# Altium PCB PCB3.PcbDoc (part 2 of 2)
Units mm, origin at the board's own origin, x right, y up, seen from the top; angles counter-clockwise.
Board outline 100 x 100 mm, 4 copper layers (Top Layer, Inner Top Layer, Inner Bottom Layer, Bottom Layer), stack 1.64 mm thick; 201 components, 196 nets, 716 pads, 122 vias.
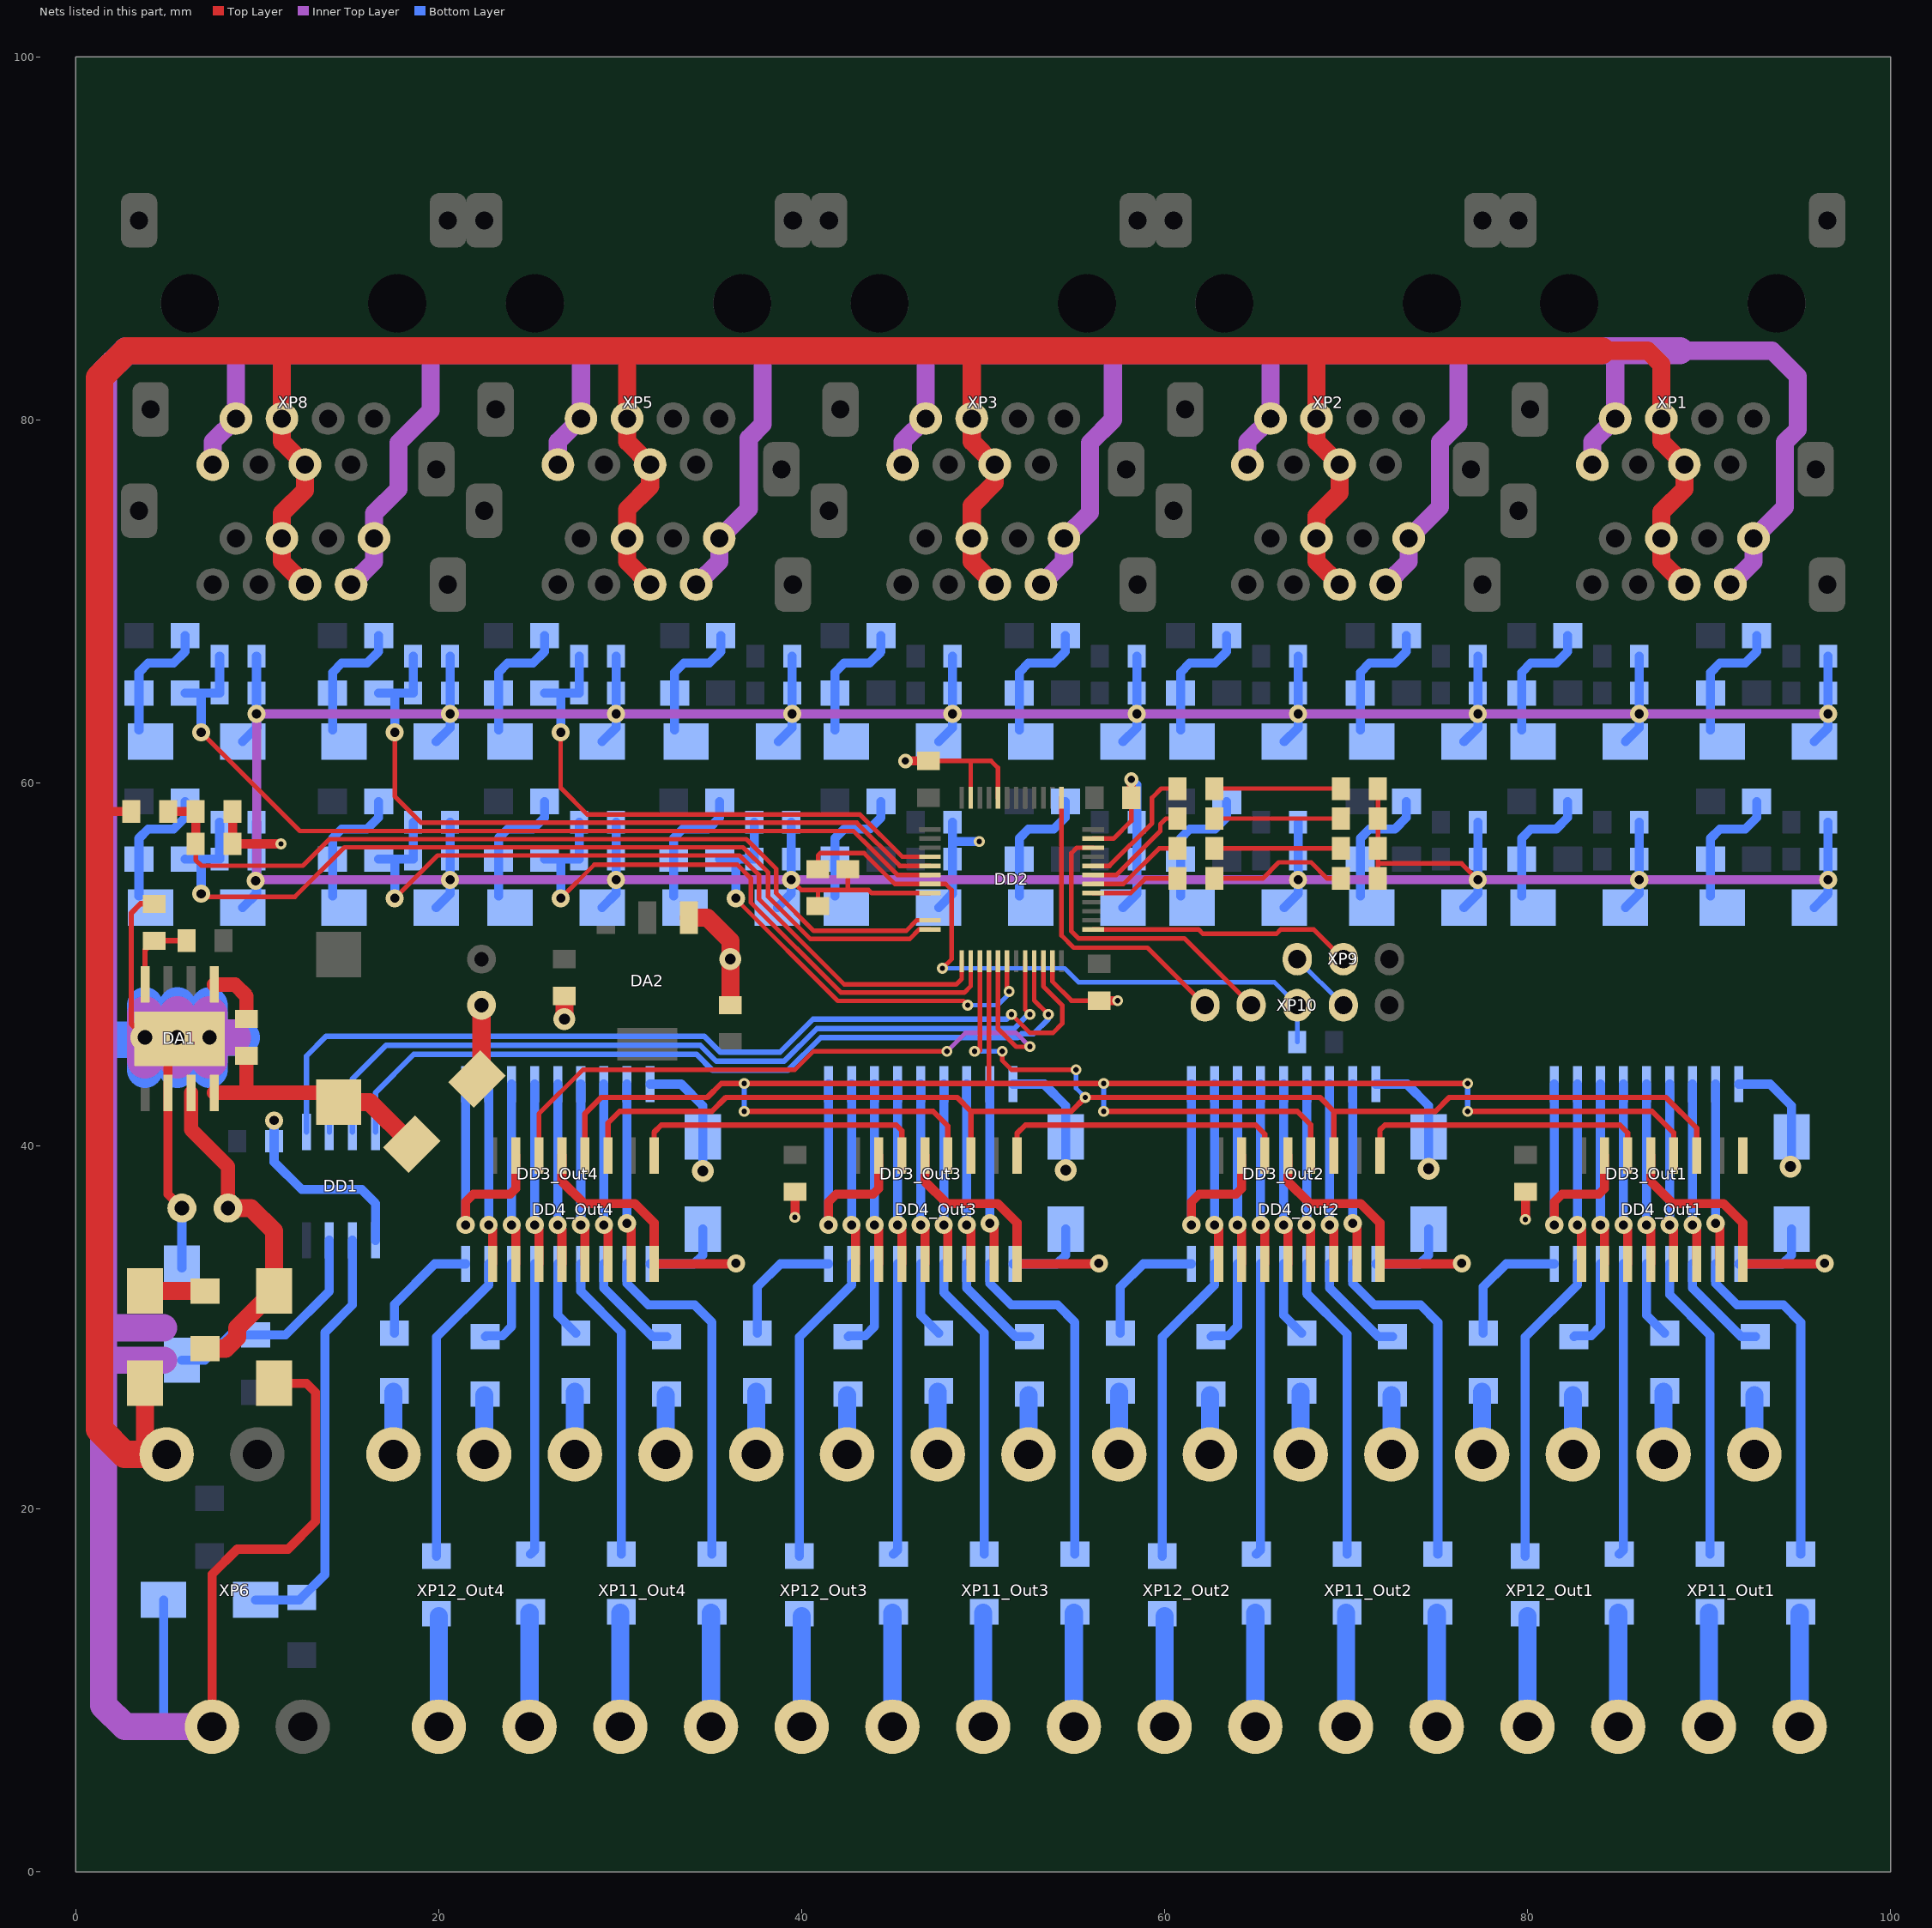
[diagram p4: the nets of this part, all layers, seen from the top]

## Via types
v1: diameter 1, hole 0.5, Top Layer to Bottom Layer, tented both sides, 81 vias
v2: diameter 0.6, hole 0.3, Top Layer to Bottom Layer, tented both sides, 24 vias
v3: diameter 1.2, hole 0.6, Top Layer to Bottom Layer, tented both sides, 7 vias
v4: diameter 0.8, hole 0.4, Top Layer to Bottom Layer, tented both sides, 5 vias
v5: diameter 1.6, hole 0.8, Top Layer to Bottom Layer, tented both sides, 3 vias
v6: diameter 0.6, hole 0.3, Top Layer to Bottom Layer, 2 vias

## Nets (pads, with @x,y where several pads share a name; then routed paths per layer and width w, separated by ;. In a path a pad name is that pad's centre, name@x,y a point inside that pad or via, vN(x,y) a via of type N, cw(c..) or ccw(c..) an arc to the next point about the centre after c; other vN are vias at no path point) (continued)
DI_MCU_14: C12_DI14.1 DD2.4 R7_DI14.2 R8_DI14.1 | length 31.1
  Top Layer w0.25: v1(26.718,62.791) 26.718,59.733 28.194,58.257 43.22,58.257 45.545,55.932 DD2.4@47.066,55.932
  Bottom Layer w0.5: R8_DI14.1@25.829,64.95 26.718,64.95 ; v1(26.718,62.791) 26.718,64.95 ; R7_DI14.2@27.734,66.982 C12_DI14.1@27.734,64.95 26.718,64.95
DI_MCU_15: C12_DI15.1 DD2.14 R7_DI15.2 R8_DI15.1 | length 34.7
  Top Layer w0.25: v1(26.718,53.647) 28.57,55.499 36.449,55.499 37.195,54.753 37.195,53.418 42.168,48.445 48.953,48.445 49.316,48.808 DD2.14@49.316,50.182
  Bottom Layer w0.5: R8_DI15.1@25.829,55.806 26.718,55.806 ; v1(26.718,53.647) 26.718,55.806 ; R7_DI15.2@27.734,57.838 C12_DI15.1@27.734,55.806 26.718,55.806
DI_MCU_16: C12_DI16.1 DD2.18 R7_DI16.2 R8_DI16.1 | length 25.7
  Top Layer w0.25: v1(36.37,53.647) 36.37,53.607 41.982,47.995 48.906,47.995 v2(49.149,47.752) ; DD2.18@51.316,50.182 51.316,48.633 v2(51.435,48.514)
  Bottom Layer w0.25: v2(49.149,47.752) 50.8,47.752 51.435,48.387 v2(51.435,48.514)
  Bottom Layer w0.5: R8_DI16.1@35.481,55.806 36.37,55.806 ; v1(36.37,53.647) 36.37,55.806 ; R7_DI16.2@37.386,57.838 C12_DI16.1@37.386,55.806 36.37,55.806
DI_MCU_17: C12_DI17.1 DD2.5 R7_DI17.2 R8_DI17.1 | length 40.7
  Top Layer w0.25: v1(17.574,62.791) 17.574,59.261 19.028,57.807 43.034,57.807 45.409,55.432 DD2.5@47.066,55.432
  Bottom Layer w0.5: R8_DI17.1@16.685,64.95 17.574,64.95 ; v1(17.574,62.791) 17.574,64.95 ; R7_DI17.2@18.59,66.982 C12_DI17.1@18.59,64.95 17.574,64.95
DI_MCU_18: C12_DI18.1 DD2.6 R7_DI18.2 R8_DI18.1 | length 49.5
  Top Layer w0.25: v1(6.906,62.791) 12.34,57.357 42.847,57.357 43.874,56.33 45.272,54.932 DD2.6@47.066,54.932
  Bottom Layer w0.5: R8_DI18.1@6.017,64.95 6.906,64.95 ; v1(6.906,62.791) 6.906,64.95 ; R7_DI18.2@7.922,66.982 C12_DI18.1@7.922,64.95 6.906,64.95
DI_MCU_19: C12_DI19.1 DD2.12 R7_DI19.2 R8_DI19.1 | length 50.3
  Top Layer w0.25: v1(6.906,53.896) 7.081,53.721 12.065,53.721 14.801,56.457 36.764,56.457 38.143,55.078 38.143,53.743 40.483,51.403 45.943,51.403 46.472,51.932 DD2.12@47.066,51.932
  Bottom Layer w0.5: R8_DI19.1@6.017,55.806 6.906,55.806 ; v1(6.906,53.896) 6.906,55.806 ; R7_DI19.2@7.922,57.838 C12_DI19.1@7.922,55.806 6.906,55.806
DI_MCU_20: C12_DI20.1 DD2.13 R7_DI20.2 R8_DI20.1 | length 43.2
  Top Layer w0.25: v1(17.574,53.647) 19.934,56.007 36.577,56.007 37.645,54.939 37.645,53.605 42.355,48.895 48.514,48.895 48.816,49.197 DD2.13@48.816,50.182
  Bottom Layer w0.5: R8_DI20.1@16.685,55.806 17.574,55.806 ; v1(17.574,53.647) 17.574,55.806 ; R7_DI20.2@18.59,57.838 C12_DI20.1@18.59,55.806 17.574,55.806
FB: DA1.4 R1.2 R2.1 | length 4.4
  Top Layer w0.3: DA1.4@3.81,48.895 3.81,50.8 R2.1@4.318,51.308 R1.2@6.096,51.308
GND: C1.1 C3.1 C4.1 C5.1 C6.1 C7.1 C8.1 C9.1 C10.1 C11.1 C12_DI1.2 C12_DI2.2 C12_DI3.2 C12_DI4.2 C12_DI5.2 C12_DI6.2 C12_DI7.2 C12_DI8.2 C12_DI9.2 C12_DI10.2 C12_DI11.2 C12_DI12.2 C12_DI13.2 C12_DI14.2 C12_DI15.2 C12_DI16.2 C12_DI17.2 C12_DI18.2 C12_DI19.2 C12_DI20.2 C13.1 C14.1 C15.1 DA1.6 DA1.9@5.715,45.898 DA2.1 DD1.5 DD2.8 DD2.23 DD2.35 DD2.44 DD2.47 DD3_Out1.9 DD3_Out2.9 DD3_Out3.9 DD3_Out4.9 DD4_Out1.8 DD4_Out1.13 DD4_Out2.8 DD4_Out2.13 DD4_Out3.8 DD4_Out3.13 DD4_Out4.8 DD4_Out4.13 R2.2 R4.2 R7_DI1.1 R7_DI2.1 R7_DI3.1 R7_DI4.1 R7_DI5.1 R7_DI6.1 R7_DI7.1 R7_DI8.1 R7_DI9.1 R7_DI10.1 R7_DI11.1 R7_DI12.1 R7_DI13.1 R7_DI14.1 R7_DI15.1 R7_DI16.1 R7_DI17.1 R7_DI18.1 R7_DI19.1 R7_DI20.1 R9.2 R10.2 R11.2 R12.2 VD2.1 VD3.1 VD4.1 VD5.1 VD6_DI1.1 VD6_DI2.1 VD6_DI3.1 VD6_DI4.1 VD6_DI5.1 VD6_DI6.1 VD6_DI7.1 VD6_DI8.1 VD6_DI9.1 VD6_DI10.1 VD6_DI11.1 VD6_DI12.1 VD6_DI13.1 VD6_DI14.1 VD6_DI15.1 VD6_DI16.1 VD6_DI17.1 VD6_DI18.1 VD6_DI19.1 VD6_DI20.1 VD7_Out1.1 VD7_Out2.1 VD7_Out3.1 VD7_Out4.1 XP1.7 XP1.8 XP1.17 XP1.18 XP2.7 XP2.8 XP2.17 XP2.18 XP3.7 XP3.8 XP3.17 XP3.18 XP5.7 XP5.8 XP5.17 XP5.18 XP6.2 XP8.7 XP8.8 XP8.17 XP8.18 XP9.3 XP10.2 | length 809.9
  Top Layer w0.25: v1(39.418,54.663) 39.979,54.102 40.894,54.102 ; C11.1@40.894,53.213 40.894,54.102 ; 42.545,54.102 C8.1@42.545,55.245 ; C9.1@46.99,61.214 49.316,61.214 ; DD2.8@47.066,53.932 43.858,53.932 43.688,54.102 40.894,54.102 ; DD2.47@49.316,59.182 49.316,61.214 ; DD2.44@50.816,59.182 50.816,60.833 50.435,61.214 49.316,61.214 ; DD2.23@53.816,50.182 53.816,49.054 54.864,48.006 C7.1@56.388,48.006 ; DD2.35@56.066,56.932 57.186,56.932 58.166,57.912 C10.1@58.166,59.182 ; R9.2@71.755,54.737 71.755,55.562 ; R12.2@71.755,59.69 R11.2@71.755,58.039 R10.2@71.755,56.388 71.755,55.562 ; v1(77.264,54.663) 76.365,55.562 71.755,55.562
  Top Layer w0.3: R2.2@4.318,53.34 3.556,53.34 3.048,52.832 3.048,46.736 v5(3.81,45.974) 3.886,45.898 DA1.9@5.715,45.898
  Top Layer w0.5: DA1.9@5.08,45.263 DA1.6@5.08,42.926 5.08,37.338 C1.1@5.842,36.576 ; XP6.2@7.5,8 7.5,16.39 8.89,17.78 11.684,17.78 13.208,19.304 13.208,26.416 12.7,26.924 VD2.1@10.922,26.924 ; R4.2@8.636,58.42 C3.1@8.636,56.642 v2(11.303,56.642) ; DD4_Out4.13@26.787,39.469 26.787,38.04 27.997,36.83 30.791,36.83 31.867,35.754 DD4_Out4.8@31.867,33.5 36.351,33.5 v1(36.379,33.528) ; v2(39.624,36.068) C14.1@39.624,37.465 ; v4(45.72,61.214) C9.1@46.99,61.214 ; DD4_Out3.13@46.787,39.469 46.787,38.04 47.997,36.83 50.791,36.83 51.867,35.754 DD4_Out3.8@51.867,33.5 56.351,33.5 v1(56.379,33.528) ; C7.1@56.388,48.006 v2(57.404,48.006) ; C10.1@58.166,59.182 v4(58.166,60.198) ; DD4_Out2.13@66.787,39.469 66.787,38.04 67.997,36.83 70.791,36.83 71.867,35.754 DD4_Out2.8@71.867,33.5 76.351,33.5 v1(76.379,33.528) ; v2(79.883,35.941) C13.1@79.883,37.465 ; DD4_Out1.13@86.787,39.469 86.787,38.04 87.997,36.83 90.791,36.83 91.867,35.754 DD4_Out1.8@91.867,33.5 96.351,33.5 v1(96.379,33.528)
  Top Layer w1: VD3.1@22.098,43.688 22.352,43.942 C4.1@22.352,47.752 ; v3(26.924,46.99) C5.1@26.924,48.26 ; DA2.1@33.782,52.578 34.798,52.578 36.068,51.308 v3(36.068,50.292) C6.1@36.068,47.752
  Inner Top Layer w0.5: v1(9.954,63.807) v1(20.622,63.807) v1(29.766,63.807) v1(39.474,63.807) v1(48.308,63.807) v1(58.468,63.807) v1(67.358,63.807) v1(77.264,63.807) v1(86.154,63.807) v1(96.568,63.807) ; v1@9.959,63.802 9.959,54.663 v1(20.622,54.663) v1(29.766,54.663) v1(39.418,54.663) v1(67.358,54.663) v1(77.264,54.663) v1(86.154,54.663) v1(96.568,54.663)
  Inner Top Layer w1: XP8.8@7.546,77.538 7.546,78.808 XP8.7@8.816,80.078 8.816,83.746 ; XP8.17@15.166,70.934 16.436,72.204 XP8.18@16.436,73.474 16.436,74.856 17.78,76.2 17.78,78.74 19.558,80.518 19.558,83.82 ; XP5.8@26.564,77.538 26.564,78.808 XP5.7@27.834,80.078 27.834,83.672 ; XP5.17@34.184,70.934 35.454,72.204 XP5.18@35.454,73.474 37.084,75.104 37.084,78.994 37.846,79.756 37.846,83.82 ; XP3.8@45.564,77.538 45.564,78.808 XP3.7@46.834,80.078 46.834,83.41 ; XP3.17@53.184,70.934 54.454,72.204 XP3.18@54.454,73.474 55.88,74.9 55.88,78.74 57.15,80.01 57.15,83.82 ; XP2.8@64.564,77.538 64.564,78.808 XP2.7@65.834,80.078 65.834,83.36 ; XP2.17@72.184,70.934 73.454,72.204 XP2.18@73.454,73.474 75.183,75.203 75.183,78.781 76.2,79.798 76.2,83.82 ; XP1.8@83.564,77.538 83.564,78.808 XP1.7@84.834,80.078 84.834,83.818 ; 88.392,83.82 93.472,83.82 94.886,82.406 94.886,79.484 94.183,78.781 94.183,75.203 XP1.18@92.454,73.474 92.454,72.204 XP1.17@91.184,70.934
  Inner Top Layer w1.5: 4.826,28.194 1.532,28.194 ; 4.826,29.972 1.532,29.972 ; XP6.2@7.5,8 2.702,8 1.532,9.17 1.532,28.194 ; 88.392,83.82 76.2,83.82 57.15,83.82 37.846,83.82 19.558,83.82 2.794,83.82 1.532,82.558 1.532,29.972 ; 1.532,28.194 1.532,29.972
  Inner Top Layer w2: 3.81,44.704 v5(3.81,45.974) 3.81,47.244 ; 5.588,44.704 v5(5.588,45.974) 5.588,47.244 ; 7.366,44.704 v5(7.366,45.974) ; 7.366,47.244 v5(7.366,45.974) ; 8.636,45.974 v5(7.366,45.974)
  Bottom Layer w0.25: XP9.3@67.31,50.292 XP10.2@69.85,47.752
  Bottom Layer w0.5: VD5.1@4.826,14.986 4.826,8.382 5.208,8 XP6.2@7.5,8 ; VD4.1@5.842,33.274 C1.1@5.842,36.576 ; VD6_DI19.1@9.192,53.139 9.954,53.901 v1@9.954,54.61 ; VD6_DI18.1@9.192,62.283 9.954,63.045 v1(9.954,63.807) C12_DI18.2@9.954,64.95 R7_DI18.1@9.954,66.982 ; v1(9.906,54.61) v1@9.954,54.61 ; R7_DI19.1@9.954,57.838 C12_DI19.2@9.954,55.806 v1@9.954,54.61 ; v1(10.922,41.402) C15.1@10.922,40.259 10.922,39.116 12.446,37.592 15.748,37.592 16.51,36.83 DD1.5@16.51,34.798 ; VD6_DI20.1@19.86,53.139 20.622,53.901 v1(20.622,54.663) C12_DI20.2@20.622,55.806 R7_DI20.1@20.622,57.838 ; VD6_DI17.1@19.86,62.283 20.622,63.045 v1(20.622,63.807) C12_DI17.2@20.622,64.95 R7_DI17.1@20.622,66.982 ; VD6_DI15.1@29.004,53.139 29.766,53.901 v1(29.766,54.663) C12_DI15.2@29.766,55.806 R7_DI15.1@29.766,57.838 ; VD6_DI14.1@29.004,62.283 29.766,63.045 v1(29.766,63.807) C12_DI14.2@29.766,64.95 R7_DI14.1@29.766,66.982 ; DD3_Out4.9@31.637,43.406 33.359,43.406 34.557,42.208 VD7_Out4.1@34.557,40.5 v3(34.557,38.621) ; VD6_DI16.1@38.656,53.139 39.418,53.901 v1(39.418,54.663) C12_DI16.2@39.418,55.806 R7_DI16.1@39.418,57.838 ; VD6_DI13.1@38.712,62.283 39.474,63.045 v1(39.474,63.807) C12_DI13.2@39.474,64.95 R7_DI13.1@39.474,66.982 ; VD6_DI11.1@47.546,53.139 48.308,53.901 C12_DI11.2@48.308,55.806 48.308,56.769 ; VD6_DI10.1@47.546,62.283 48.308,63.045 v1(48.308,63.807) C12_DI10.2@48.308,64.95 R7_DI10.1@48.308,66.982 ; R7_DI11.1@48.308,57.838 48.308,56.769 ; v2(49.784,56.769) 48.308,56.769 ; DD3_Out3.9@51.637,43.406 53.359,43.406 54.557,42.208 VD7_Out3.1@54.557,40.5 v3(54.557,38.661) ; VD6_DI12.1@57.706,53.139 58.468,53.901 C12_DI12.2@58.468,55.806 R7_DI12.1@58.468,57.838 58.468,59.896 v4(58.166,60.198) ; VD6_DI9.1@57.706,62.283 58.468,63.045 v1(58.468,63.807) C12_DI9.2@58.468,64.95 R7_DI9.1@58.468,66.982 ; VD6_DI7.1@66.596,53.139 67.358,53.901 v1(67.358,54.663) C12_DI7.2@67.358,55.806 R7_DI7.1@67.358,57.838 ; VD6_DI6.1@66.596,62.283 67.358,63.045 v1(67.358,63.807) C12_DI6.2@67.358,64.95 R7_DI6.1@67.358,66.982 ; DD3_Out2.9@71.637,43.406 73.359,43.406 74.557,42.208 VD7_Out2.1@74.557,40.5 v3(74.557,38.743) ; VD6_DI8.1@76.502,53.139 77.264,53.901 v1(77.264,54.663) C12_DI8.2@77.264,55.806 R7_DI8.1@77.264,57.838 ; VD6_DI5.1@76.502,62.283 77.264,63.045 v1(77.264,63.807) C12_DI5.2@77.264,64.95 R7_DI5.1@77.264,66.982 ; VD6_DI3.1@85.392,53.139 86.154,53.901 v1(86.154,54.663) C12_DI3.2@86.154,55.806 R7_DI3.1@86.154,57.838 ; VD6_DI2.1@85.392,62.283 86.154,63.045 v1(86.154,63.807) C12_DI2.2@86.154,64.95 R7_DI2.1@86.154,66.982 ; DD3_Out1.9@91.637,43.406 93.359,43.406 94.557,42.208 VD7_Out1.1@94.557,40.5 94.557,38.931 v3(94.488,38.862) ; VD6_DI4.1@95.806,53.139 96.568,53.901 v1(96.568,54.663) C12_DI4.2@96.568,55.806 R7_DI4.1@96.568,57.838 ; VD6_DI1.1@95.806,62.283 96.568,63.045 v1(96.568,63.807) C12_DI1.2@96.568,64.95 R7_DI1.1@96.568,66.982
  Bottom Layer w2: 1.905,45.847 v5@3.683,45.847 ; 3.81,44.196 v5(3.81,45.974) 3.81,47.752 ; 5.588,44.196 v5(5.588,45.974) 5.588,47.752 ; 7.366,44.196 v5(7.366,45.974) ; 7.366,47.752 v5(7.366,45.974) ; 9.144,45.974 v5(7.366,45.974)
LC: DD2.16 DD4_Out1.12 DD4_Out2.12 DD4_Out3.12 DD4_Out4.12 | length 102.6
  Top Layer w0.25: 50.316,43.458 DD2.16@50.316,50.182
  Top Layer w0.3: DD4_Out4.12@28.057,39.469 28.057,41.773 28.956,42.672 34.798,42.672 35.56,43.434 v2(36.83,43.434) v2(56.642,43.434) v2(76.708,43.434) ; v2(36.83,41.91) 47.244,41.91 48.057,41.097 DD4_Out3.12@48.057,39.469 ; v2(56.642,41.91) 67.31,41.91 68.057,41.163 DD4_Out2.12@68.057,39.469 ; v2(76.708,41.91) 86.868,41.91 88.057,40.721 DD4_Out1.12@88.057,39.469
  Bottom Layer w0.3: v2(36.83,41.91) v2(36.83,43.434) ; v2(56.642,41.91) v2(56.642,43.434) ; v2(76.708,41.91) v2(76.708,43.434)
"LED 1": DD2.29 HL1.1 | length 5
  Top Layer w0.25: DD2.29@56.066,53.932 58.123,53.932 58.928,54.737 HL1.1@60.706,54.737
"LED 2": DD2.30 HL2.1 | length 5.5
  Top Layer w0.25: DD2.30@56.066,54.432 57.734,54.432 59.69,56.388 HL2.1@60.706,56.388
"LED 3": DD2.31 HL3.1 | length 6.2
  Top Layer w0.25: DD2.31@56.066,54.932 57.345,54.932 59.759,57.346 59.759,57.727 60.071,58.039 HL3.1@60.706,58.039
"LED 4": DD2.32 HL4.1 | length 7.2
  Top Layer w0.25: DD2.32@56.066,55.432 56.956,55.432 59.309,57.785 59.309,59.182 59.817,59.69 HL4.1@60.706,59.69
MOSI: DD2.17 DD4_Out4.14 | length 37.4
  Top Layer w0.25: DD4_Out4.14@25.517,39.469 25.517,41.773 27.94,44.196 39.624,44.196 40.64,45.212 v6(48.006,45.212) ; DD2.17@50.816,50.182 50.81,50.176 50.81,46.472 51.816,45.466 v6(52.578,45.466)
  Inner Top Layer w0.25: v6(48.006,45.212) 49.022,46.228 51.816,46.228 v6(52.578,45.466)
NetC1_2: C1.2 DA1.7 FU1.2 VD2.2 | length 19
  Top Layer w0.8: DA1.7@6.35,42.926 6.35,40.894 8.382,38.862 C1.2@8.382,36.576
  Top Layer w1: FU1.2@7.112,28.829 8.255,28.829 8.89,29.464 8.89,29.972 VD2.2@10.922,32.004 10.922,35.306 9.652,36.576 C1.2@8.382,36.576
NetC2_1: C2.1 DA1.1 | length 3.3
  Top Layer w0.8: DA1.1@7.62,48.895 8.763,48.895 9.398,48.26 C2.1@9.398,46.99
NetC2_2: C2.2 DA1.8 L1.2 VD3.2 | length 14.1
  Top Layer w0.8: DA1.8@7.62,42.926 9.398,42.926 ; C2.2@9.398,44.958 9.398,42.926 ; L1.2@14.478,42.418 13.97,42.926 9.398,42.926
  Top Layer w1: L1.2@14.478,42.418 16.184,42.418 VD3.2@18.506,40.096
NetDD1_6: DD1.6 FU3.2 VD5.2 | length 23.3
  Bottom Layer w0.5: VD5.2@9.906,14.986 FU3.2@12.319,14.986 ; FU3.2@12.446,15.113 13.716,16.383 13.716,29.718 15.24,31.242 DD1.6@15.24,34.798
NetDD1_7: DD1.7 FU2.2 VD4.2 | length 12.5
  Bottom Layer w0.5: VD4.2@5.842,28.194 7.112,28.194 8.509,29.591 FU2.2@9.906,29.591 11.557,29.591 13.97,32.004 DD1.7@13.97,34.798
NetDD3_Out1_1: DD3_Out1.1 DD4_Out1.15 | length 13.9
  Top Layer w0.5: v1(81.477,35.644) 81.477,36.914 81.901,37.338 83.933,37.338 84.247,37.652 DD4_Out1.15@84.247,39.469
  Bottom Layer w0.5: v1(81.477,35.644) DD3_Out1.1@81.477,43.406
NetDD3_Out1_2: DD3_Out1.2 DD4_Out1.1 | length 10
  Top Layer w0.5: v1(82.747,35.644) 82.977,35.414 DD4_Out1.1@82.977,33.5
  Bottom Layer w0.5: v1(82.747,35.644) DD3_Out1.2@82.747,43.406
NetDD3_Out1_3: DD3_Out1.3 DD4_Out1.2 | length 9.7
  Top Layer w0.5: DD4_Out1.2@84.247,33.5 v1@84.247,35.414
  Bottom Layer w0.5: v1(84.017,35.644) DD3_Out1.3@84.017,43.406
NetDD3_Out1_4: DD3_Out1.4 DD4_Out1.3 | length 9.7
  Top Layer w0.5: DD4_Out1.3@85.517,33.5 v1@85.517,35.414
  Bottom Layer w0.5: v1(85.287,35.644) DD3_Out1.4@85.287,43.406
NetDD3_Out1_5: DD3_Out1.5 DD4_Out1.4 | length 9.7
  Top Layer w0.5: DD4_Out1.4@86.787,33.5 v1@86.787,35.414
  Bottom Layer w0.5: v1(86.557,35.644) DD3_Out1.5@86.557,43.406
NetDD3_Out1_6: DD3_Out1.6 DD4_Out1.5 | length 9.7
  Top Layer w0.5: DD4_Out1.5@88.057,33.5 v1@88.057,35.414
  Bottom Layer w0.5: v1(87.827,35.644) DD3_Out1.6@87.827,43.406
NetDD3_Out1_7: DD3_Out1.7 DD4_Out1.6 | length 9.7
  Top Layer w0.5: DD4_Out1.6@89.327,33.5 v1@89.327,35.414
  Bottom Layer w0.5: v1(89.097,35.644) DD3_Out1.7@89.097,43.406
NetDD3_Out1_8: DD3_Out1.8 DD4_Out1.7 | length 9.7
  Top Layer w0.5: DD4_Out1.7@90.597,33.5 v1@90.597,35.5
  Bottom Layer w0.5: v1(90.367,35.73) DD3_Out1.8@90.367,43.406
NetDD3_Out1_10: DD3_Out1.10 VD7_Out1.2 | length 4.6
  Bottom Layer w0.5: DD3_Out1.10@91.637,33.5 94.065,33.5 94.557,33.992 VD7_Out1.2@94.557,35.42
NetDD3_Out1_11: DD3_Out1.11 FU12_Out1.2 | length 19.4
  Bottom Layer w0.5: DD3_Out1.11@90.367,33.5 90.367,32.428 91.553,31.242 94.093,31.242 95.057,30.278 FU12_Out1.2@95.057,17.5
NetDD3_Out1_12: DD3_Out1.12 FU11_Out1.2 | length 5.9
  Bottom Layer w0.5: DD3_Out1.12@89.097,33.5 89.097,32.174 91.771,29.5 FU11_Out1.2@92.557,29.5
NetDD3_Out1_13: DD3_Out1.13 FU10_Out1.2 | length 16.9
  Bottom Layer w0.5: DD3_Out1.13@87.827,33.5 87.827,31.807 90.057,29.577 FU10_Out1.2@90.057,17.5
NetDD3_Out1_14: DD3_Out1.14 FU9_Out1.2 | length 4.2
  Bottom Layer w0.5: DD3_Out1.14@86.557,33.5 86.557,30.675 FU9_Out1.2@87.557,29.675
NetDD3_Out1_15: DD3_Out1.15 FU8_Out1.2 | length 16.1
  Bottom Layer w0.5: FU8_Out1.2@85.057,17.5 85.287,17.73 DD3_Out1.15@85.287,33.5
NetDD3_Out1_16: DD3_Out1.16 FU7_Out1.2 | length 5.1
  Bottom Layer w0.5: FU7_Out1.2@82.557,29.5 82.605,29.548 83.509,29.548 84.017,30.056 DD3_Out1.16@84.017,33.5
NetDD3_Out1_17: DD3_Out1.17 FU6_Out1.2 | length 17.3
  Bottom Layer w0.5: FU6_Out1.2@79.869,17.399 79.869,29.464 82.747,32.342 DD3_Out1.17@82.747,33.5
NetDD3_Out1_18: DD3_Out1.18 FU5_Out1.2 | length 7
  Bottom Layer w0.5: FU5_Out1.2@77.557,29.675 77.557,32.232 78.825,33.5 DD3_Out1.18@81.477,33.5
NetDD3_Out2_1: DD3_Out2.1 DD4_Out2.15 | length 13.9
  Top Layer w0.5: v1(61.477,35.644) 61.477,36.914 61.901,37.338 63.933,37.338 64.247,37.652 DD4_Out2.15@64.247,39.469
  Bottom Layer w0.5: v1(61.477,35.644) DD3_Out2.1@61.477,43.406
NetDD3_Out2_2: DD3_Out2.2 DD4_Out2.1 | length 10
  Top Layer w0.5: v1(62.747,35.644) 62.977,35.414 DD4_Out2.1@62.977,33.5
  Bottom Layer w0.5: v1(62.747,35.644) DD3_Out2.2@62.747,43.406
NetDD3_Out2_3: DD3_Out2.3 DD4_Out2.2 | length 9.7
  Top Layer w0.5: DD4_Out2.2@64.247,33.5 v1@64.247,35.414
  Bottom Layer w0.5: v1(64.017,35.644) DD3_Out2.3@64.017,43.406
NetDD3_Out2_4: DD3_Out2.4 DD4_Out2.3 | length 9.7
  Top Layer w0.5: DD4_Out2.3@65.517,33.5 v1@65.517,35.414
  Bottom Layer w0.5: v1(65.287,35.644) DD3_Out2.4@65.287,43.406
NetDD3_Out2_5: DD3_Out2.5 DD4_Out2.4 | length 9.7
  Top Layer w0.5: DD4_Out2.4@66.787,33.5 v1@66.787,35.414
  Bottom Layer w0.5: v1(66.557,35.644) DD3_Out2.5@66.557,43.406
NetDD3_Out2_6: DD3_Out2.6 DD4_Out2.5 | length 9.7
  Top Layer w0.5: DD4_Out2.5@68.057,33.5 v1@68.057,35.414
  Bottom Layer w0.5: v1(67.827,35.644) DD3_Out2.6@67.827,43.406
NetDD3_Out2_7: DD3_Out2.7 DD4_Out2.6 | length 9.7
  Top Layer w0.5: DD4_Out2.6@69.327,33.5 v1@69.327,35.414
  Bottom Layer w0.5: v1(69.097,35.644) DD3_Out2.7@69.097,43.406
NetDD3_Out2_8: DD3_Out2.8 DD4_Out2.7 | length 9.7
  Top Layer w0.5: DD4_Out2.7@70.597,33.5 v1@70.597,35.5
  Bottom Layer w0.5: v1(70.367,35.73) DD3_Out2.8@70.367,43.406
NetDD3_Out2_10: DD3_Out2.10 VD7_Out2.2 | length 4.6
  Bottom Layer w0.5: DD3_Out2.10@71.637,33.5 74.065,33.5 74.557,33.992 VD7_Out2.2@74.557,35.42
NetDD3_Out2_11: DD3_Out2.11 FU12_Out2.2 | length 19.4
  Bottom Layer w0.5: DD3_Out2.11@70.367,33.5 70.367,32.428 71.553,31.242 74.093,31.242 75.057,30.278 FU12_Out2.2@75.057,17.5
NetDD3_Out2_12: DD3_Out2.12 FU11_Out2.2 | length 5.9
  Bottom Layer w0.5: DD3_Out2.12@69.097,33.5 69.097,32.174 71.771,29.5 FU11_Out2.2@72.557,29.5
NetDD3_Out2_13: DD3_Out2.13 FU10_Out2.2 | length 16.9
  Bottom Layer w0.5: DD3_Out2.13@67.827,33.5 67.827,31.868 70.057,29.638 FU10_Out2.2@70.057,17.5
NetDD3_Out2_14: DD3_Out2.14 FU9_Out2.2 | length 4.2
  Bottom Layer w0.5: DD3_Out2.14@66.557,33.5 66.557,30.675 FU9_Out2.2@67.557,29.675
NetDD3_Out2_15: DD3_Out2.15 FU8_Out2.2 | length 16.1
  Bottom Layer w0.5: FU8_Out2.2@65.057,17.5 65.287,17.73 DD3_Out2.15@65.287,33.5
NetDD3_Out2_16: DD3_Out2.16 FU7_Out2.2 | length 5.1
  Bottom Layer w0.5: FU7_Out2.2@62.557,29.5 62.605,29.548 63.509,29.548 64.017,30.056 DD3_Out2.16@64.017,33.5
NetDD3_Out2_17: DD3_Out2.17 FU6_Out2.2 | length 17.3
  Bottom Layer w0.5: FU6_Out2.2@59.869,17.399 59.869,29.464 62.747,32.342 DD3_Out2.17@62.747,33.5
NetDD3_Out2_18: DD3_Out2.18 FU5_Out2.2 | length 7
  Bottom Layer w0.5: FU5_Out2.2@57.557,29.675 57.557,32.232 58.825,33.5 DD3_Out2.18@61.477,33.5
NetDD3_Out3_1: DD3_Out3.1 DD4_Out3.15 | length 13.9
  Top Layer w0.5: v1(41.477,35.644) 41.477,36.914 41.901,37.338 43.933,37.338 44.247,37.652 DD4_Out3.15@44.247,39.469
  Bottom Layer w0.5: v1(41.477,35.644) DD3_Out3.1@41.477,43.406
NetDD3_Out3_2: DD3_Out3.2 DD4_Out3.1 | length 10
  Top Layer w0.5: v1(42.747,35.644) 42.977,35.414 DD4_Out3.1@42.977,33.5
  Bottom Layer w0.5: v1(42.747,35.644) DD3_Out3.2@42.747,43.406
NetDD3_Out3_3: DD3_Out3.3 DD4_Out3.2 | length 9.7
  Top Layer w0.5: DD4_Out3.2@44.247,33.5 v1@44.247,35.414
  Bottom Layer w0.5: v1(44.017,35.644) DD3_Out3.3@44.017,43.406
NetDD3_Out3_4: DD3_Out3.4 DD4_Out3.3 | length 9.7
  Top Layer w0.5: DD4_Out3.3@45.517,33.5 v1@45.517,35.414
  Bottom Layer w0.5: v1(45.287,35.644) DD3_Out3.4@45.287,43.406
NetDD3_Out3_5: DD3_Out3.5 DD4_Out3.4 | length 9.7
  Top Layer w0.5: DD4_Out3.4@46.787,33.5 v1@46.787,35.414
  Bottom Layer w0.5: v1(46.557,35.644) DD3_Out3.5@46.557,43.406
NetDD3_Out3_6: DD3_Out3.6 DD4_Out3.5 | length 9.7
  Top Layer w0.5: DD4_Out3.5@48.057,33.5 v1@48.057,35.414
  Bottom Layer w0.5: v1(47.827,35.644) DD3_Out3.6@47.827,43.406
NetDD3_Out3_7: DD3_Out3.7 DD4_Out3.6 | length 9.7
  Top Layer w0.5: DD4_Out3.6@49.327,33.5 v1@49.327,35.414
  Bottom Layer w0.5: v1(49.097,35.644) DD3_Out3.7@49.097,43.406
NetDD3_Out3_8: DD3_Out3.8 DD4_Out3.7 | length 9.7
  Top Layer w0.5: DD4_Out3.7@50.597,33.5 v1@50.597,35.5
  Bottom Layer w0.5: v1(50.367,35.73) DD3_Out3.8@50.367,43.406
NetDD3_Out3_10: DD3_Out3.10 VD7_Out3.2 | length 4.6
  Bottom Layer w0.5: DD3_Out3.10@51.637,33.5 54.065,33.5 54.557,33.992 VD7_Out3.2@54.557,35.42
NetDD3_Out3_11: DD3_Out3.11 FU12_Out3.2 | length 19.4
  Bottom Layer w0.5: DD3_Out3.11@50.367,33.5 50.367,32.428 51.553,31.242 54.093,31.242 55.057,30.278 FU12_Out3.2@55.057,17.5
NetDD3_Out3_12: DD3_Out3.12 FU11_Out3.2 | length 5.9
  Bottom Layer w0.5: DD3_Out3.12@49.097,33.5 49.097,32.174 51.771,29.5 FU11_Out3.2@52.557,29.5
NetDD3_Out3_13: DD3_Out3.13 FU10_Out3.2 | length 16.9
  Bottom Layer w0.5: DD3_Out3.13@47.827,33.5 47.827,31.929 50.057,29.699 FU10_Out3.2@50.057,17.5
NetDD3_Out3_14: DD3_Out3.14 FU9_Out3.2 | length 4.2
  Bottom Layer w0.5: DD3_Out3.14@46.557,33.5 46.557,30.675 FU9_Out3.2@47.557,29.675
NetDD3_Out3_15: DD3_Out3.15 FU8_Out3.2 | length 16.1
  Bottom Layer w0.5: FU8_Out3.2@45.057,17.5 45.287,17.73 DD3_Out3.15@45.287,33.5
NetDD3_Out3_16: DD3_Out3.16 FU7_Out3.2 | length 5.1
  Bottom Layer w0.5: FU7_Out3.2@42.557,29.5 42.605,29.548 43.509,29.548 44.017,30.056 DD3_Out3.16@44.017,33.5
NetDD3_Out3_17: DD3_Out3.17 FU6_Out3.2 | length 17.3
  Bottom Layer w0.5: FU6_Out3.2@39.869,17.399 39.869,29.464 42.747,32.342 DD3_Out3.17@42.747,33.5
NetDD3_Out3_18: DD3_Out3.18 FU5_Out3.2 | length 7
  Bottom Layer w0.5: FU5_Out3.2@37.557,29.675 37.557,32.232 38.825,33.5 DD3_Out3.18@41.477,33.5
NetDD3_Out4_1: DD3_Out4.1 DD4_Out4.15 | length 13.9
  Top Layer w0.5: v1(21.477,35.644) 21.477,36.914 21.901,37.338 23.933,37.338 24.247,37.652 DD4_Out4.15@24.247,39.469
  Bottom Layer w0.5: v1(21.477,35.644) DD3_Out4.1@21.477,43.406
NetDD3_Out4_2: DD3_Out4.2 DD4_Out4.1 | length 10
  Top Layer w0.5: v1(22.747,35.644) 22.977,35.414 DD4_Out4.1@22.977,33.5
  Bottom Layer w0.5: v1(22.747,35.644) DD3_Out4.2@22.747,43.406
NetDD3_Out4_3: DD3_Out4.3 DD4_Out4.2 | length 9.7
  Top Layer w0.5: DD4_Out4.2@24.247,33.5 v1@24.247,35.414
  Bottom Layer w0.5: v1(24.017,35.644) DD3_Out4.3@24.017,43.406
NetDD3_Out4_4: DD3_Out4.4 DD4_Out4.3 | length 9.7
  Top Layer w0.5: DD4_Out4.3@25.517,33.5 v1@25.517,35.414
  Bottom Layer w0.5: v1(25.287,35.644) DD3_Out4.4@25.287,43.406
NetDD3_Out4_5: DD3_Out4.5 DD4_Out4.4 | length 9.7
  Top Layer w0.5: DD4_Out4.4@26.787,33.5 v1@26.787,35.414
  Bottom Layer w0.5: v1(26.557,35.644) DD3_Out4.5@26.557,43.406
NetDD3_Out4_6: DD3_Out4.6 DD4_Out4.5 | length 9.7
  Top Layer w0.5: DD4_Out4.5@28.057,33.5 v1@28.057,35.414
  Bottom Layer w0.5: v1(27.827,35.644) DD3_Out4.6@27.827,43.406
NetDD3_Out4_7: DD3_Out4.7 DD4_Out4.6 | length 9.7
  Top Layer w0.5: DD4_Out4.6@29.327,33.5 v1@29.327,35.414
  Bottom Layer w0.5: v1(29.097,35.644) DD3_Out4.7@29.097,43.406
NetDD3_Out4_8: DD3_Out4.8 DD4_Out4.7 | length 9.7
  Top Layer w0.5: DD4_Out4.7@30.597,33.5 v1@30.597,35.5
  Bottom Layer w0.5: v1(30.367,35.73) DD3_Out4.8@30.367,43.406
NetDD3_Out4_10: DD3_Out4.10 VD7_Out4.2 | length 4.6
  Bottom Layer w0.5: DD3_Out4.10@31.637,33.5 34.065,33.5 34.557,33.992 VD7_Out4.2@34.557,35.42
NetDD3_Out4_11: DD3_Out4.11 FU12_Out4.2 | length 19.4
  Bottom Layer w0.5: DD3_Out4.11@30.367,33.5 30.367,32.428 31.553,31.242 34.093,31.242 35.057,30.278 FU12_Out4.2@35.057,17.5
NetDD3_Out4_12: DD3_Out4.12 FU11_Out4.2 | length 5.9
  Bottom Layer w0.5: DD3_Out4.12@29.097,33.5 29.097,32.174 31.771,29.5 FU11_Out4.2@32.557,29.5
NetDD3_Out4_13: DD3_Out4.13 FU10_Out4.2 | length 16.9
  Bottom Layer w0.5: DD3_Out4.13@27.827,33.5 27.827,31.99 30.057,29.76 FU10_Out4.2@30.057,17.5
NetDD3_Out4_14: DD3_Out4.14 FU9_Out4.2 | length 4.2
  Bottom Layer w0.5: DD3_Out4.14@26.557,33.5 26.557,30.675 FU9_Out4.2@27.557,29.675
NetDD3_Out4_15: DD3_Out4.15 FU8_Out4.2 | length 16.1
  Bottom Layer w0.5: FU8_Out4.2@25.057,17.5 25.287,17.73 DD3_Out4.15@25.287,33.5
NetDD3_Out4_16: DD3_Out4.16 FU7_Out4.2 | length 5.1
  Bottom Layer w0.5: FU7_Out4.2@22.557,29.5 22.605,29.548 23.509,29.548 24.017,30.056 DD3_Out4.16@24.017,33.5
NetDD3_Out4_17: DD3_Out4.17 FU6_Out4.2 | length 17.3
  Bottom Layer w0.5: FU6_Out4.2@19.869,17.399 19.869,29.464 22.747,32.342 DD3_Out4.17@22.747,33.5
NetDD3_Out4_18: DD3_Out4.18 FU5_Out4.2 | length 6.4
  Bottom Layer w0.5: FU5_Out4.2@17.557,29.675 17.557,31.273 19.784,33.5 DD3_Out4.18@21.477,33.5
NetDD4_Out1_9: DD4_Out1.9
NetDD4_Out1_14: DD4_Out1.14 DD4_Out2.9 | length 16.6
  Top Layer w0.3: DD4_Out2.9@71.867,39.469 71.867,40.879 72.136,41.148 85.09,41.148 85.517,40.721 DD4_Out1.14@85.517,39.469
NetDD4_Out2_14: DD4_Out2.14 DD4_Out3.9 | length 16.5
  Top Layer w0.3: DD4_Out3.9@51.867,39.469 51.867,40.691 52.324,41.148 65.024,41.148 65.517,40.655 DD4_Out2.14@65.517,39.469
NetDD4_Out3_14: DD4_Out3.14 DD4_Out4.9 | length 16.6
  Top Layer w0.3: DD4_Out4.9@31.867,39.469 31.867,40.757 32.258,41.148 45.212,41.148 45.517,40.843 DD4_Out3.14@45.517,39.469
NetFU1_1: FU1.1 VD1.2 | length 3.3
  Top Layer w1: VD1.2@3.81,32.004 FU1.1@7.112,32.004
NetFU4_DI1_2: FU4_DI1.2 R8_DI1.2 VD6_DI1.2 | length 7.1
  Bottom Layer w0.5: VD6_DI1.2@90.091,62.918 FU4_DI1.2@90.091,64.95 90.091,66.093 90.599,66.601 91.996,66.601 92.631,67.236 R8_DI1.2@92.631,68.125
NetFU4_DI2_2: FU4_DI2.2 R8_DI2.2 VD6_DI2.2 | length 7.1
  Bottom Layer w0.5: VD6_DI2.2@79.677,62.918 FU4_DI2.2@79.677,64.95 79.677,66.093 80.185,66.601 81.582,66.601 82.217,67.236 R8_DI2.2@82.217,68.125
NetFU4_DI3_2: FU4_DI3.2 R8_DI3.2 VD6_DI3.2 | length 7.1
  Bottom Layer w0.5: VD6_DI3.2@79.677,53.774 FU4_DI3.2@79.677,55.806 79.677,56.949 80.185,57.457 81.582,57.457 82.217,58.092 R8_DI3.2@82.217,58.981
NetFU4_DI4_2: FU4_DI4.2 R8_DI4.2 VD6_DI4.2 | length 7.1
  Bottom Layer w0.5: VD6_DI4.2@90.091,53.774 FU4_DI4.2@90.091,55.806 90.091,56.949 90.599,57.457 91.996,57.457 92.631,58.092 R8_DI4.2@92.631,58.981
NetFU4_DI5_2: FU4_DI5.2 R8_DI5.2 VD6_DI5.2 | length 7.1
  Bottom Layer w0.5: VD6_DI5.2@70.787,62.918 FU4_DI5.2@70.787,64.95 70.787,66.093 71.295,66.601 72.692,66.601 73.327,67.236 R8_DI5.2@73.327,68.125
NetFU4_DI6_2: FU4_DI6.2 R8_DI6.2 VD6_DI6.2 | length 7.1
  Bottom Layer w0.5: VD6_DI6.2@60.881,62.918 FU4_DI6.2@60.881,64.95 60.881,66.093 61.389,66.601 62.786,66.601 63.421,67.236 R8_DI6.2@63.421,68.125
NetFU4_DI7_2: FU4_DI7.2 R8_DI7.2 VD6_DI7.2 | length 7.1
  Bottom Layer w0.5: VD6_DI7.2@60.881,53.774 FU4_DI7.2@60.881,55.806 60.881,56.949 61.389,57.457 62.786,57.457 63.421,58.092 R8_DI7.2@63.421,58.981
NetFU4_DI8_2: FU4_DI8.2 R8_DI8.2 VD6_DI8.2 | length 7.1
  Bottom Layer w0.5: VD6_DI8.2@70.787,53.774 FU4_DI8.2@70.787,55.806 70.787,56.949 71.295,57.457 72.692,57.457 73.327,58.092 R8_DI8.2@73.327,58.981
NetFU4_DI9_2: FU4_DI9.2 R8_DI9.2 VD6_DI9.2 | length 7.1
  Bottom Layer w0.5: VD6_DI9.2@51.991,62.918 FU4_DI9.2@51.991,64.95 51.991,66.093 52.499,66.601 53.896,66.601 54.531,67.236 R8_DI9.2@54.531,68.125
NetFU4_DI10_2: FU4_DI10.2 R8_DI10.2 VD6_DI10.2 | length 7.1
  Bottom Layer w0.5: VD6_DI10.2@41.831,62.918 FU4_DI10.2@41.831,64.95 41.831,66.093 42.339,66.601 43.736,66.601 44.371,67.236 R8_DI10.2@44.371,68.125
NetFU4_DI11_2: FU4_DI11.2 R8_DI11.2 VD6_DI11.2 | length 7.1
  Bottom Layer w0.5: VD6_DI11.2@41.831,53.774 FU4_DI11.2@41.831,55.806 41.831,56.949 42.339,57.457 43.736,57.457 44.371,58.092 R8_DI11.2@44.371,58.981
NetFU4_DI12_2: FU4_DI12.2 R8_DI12.2 VD6_DI12.2 | length 7.1
  Bottom Layer w0.5: VD6_DI12.2@51.991,53.774 FU4_DI12.2@51.991,55.806 51.991,56.949 52.499,57.457 53.896,57.457 54.531,58.092 R8_DI12.2@54.531,58.981
NetFU4_DI13_2: FU4_DI13.2 R8_DI13.2 VD6_DI13.2 | length 7.1
  Bottom Layer w0.5: VD6_DI13.2@32.997,62.918 FU4_DI13.2@32.997,64.95 32.997,66.093 33.505,66.601 34.902,66.601 35.537,67.236 R8_DI13.2@35.537,68.125
NetFU4_DI14_2: FU4_DI14.2 R8_DI14.2 VD6_DI14.2 | length 7.1
  Bottom Layer w0.5: VD6_DI14.2@23.289,62.918 FU4_DI14.2@23.289,64.95 23.289,66.093 23.797,66.601 25.194,66.601 25.829,67.236 R8_DI14.2@25.829,68.125
NetFU4_DI15_2: FU4_DI15.2 R8_DI15.2 VD6_DI15.2 | length 7.1
  Bottom Layer w0.5: VD6_DI15.2@23.289,53.774 FU4_DI15.2@23.289,55.806 23.289,56.949 23.797,57.457 25.194,57.457 25.829,58.092 R8_DI15.2@25.829,58.981
NetFU4_DI16_2: FU4_DI16.2 R8_DI16.2 VD6_DI16.2 | length 7.1
  Bottom Layer w0.5: VD6_DI16.2@32.941,53.774 FU4_DI16.2@32.941,55.806 32.941,56.949 33.449,57.457 34.846,57.457 35.481,58.092 R8_DI16.2@35.481,58.981
NetFU4_DI17_2: FU4_DI17.2 R8_DI17.2 VD6_DI17.2 | length 7.1
  Bottom Layer w0.5: VD6_DI17.2@14.145,62.918 FU4_DI17.2@14.145,64.95 14.145,66.093 14.653,66.601 16.05,66.601 16.685,67.236 R8_DI17.2@16.685,68.125
NetFU4_DI18_2: FU4_DI18.2 R8_DI18.2 VD6_DI18.2 | length 7.1
  Bottom Layer w0.5: VD6_DI18.2@3.477,62.918 FU4_DI18.2@3.477,64.95 3.477,66.093 3.985,66.601 5.382,66.601 6.017,67.236 R8_DI18.2@6.017,68.125
NetFU4_DI19_2: FU4_DI19.2 R8_DI19.2 VD6_DI19.2 | length 7.1
  Bottom Layer w0.5: VD6_DI19.2@3.477,53.774 FU4_DI19.2@3.477,55.806 3.477,56.949 3.985,57.457 5.382,57.457 6.017,58.092 R8_DI19.2@6.017,58.981
NetFU4_DI20_2: FU4_DI20.2 R8_DI20.2 VD6_DI20.2 | length 7.1
  Bottom Layer w0.5: VD6_DI20.2@14.145,53.774 FU4_DI20.2@14.145,55.806 14.145,56.949 14.653,57.457 16.05,57.457 16.685,58.092 R8_DI20.2@16.685,58.981
NetFU5_Out1_1: FU5_Out1.1 XP12_Out1.1 | length 3.4
  Bottom Layer w1: XP12_Out1.1@77.5,23 FU5_Out1.1@77.5,26.443
NetFU5_Out2_1: FU5_Out2.1 XP12_Out2.1 | length 3.4
  Bottom Layer w1: XP12_Out2.1@57.5,23 FU5_Out2.1@57.5,26.443
NetFU5_Out3_1: FU5_Out3.1 XP12_Out3.1 | length 3.4
  Bottom Layer w1: XP12_Out3.1@37.5,23 FU5_Out3.1@37.5,26.443
NetFU5_Out4_1: FU5_Out4.1 XP12_Out4.1 | length 3.4
  Bottom Layer w1: XP12_Out4.1@17.5,23 FU5_Out4.1@17.5,26.443
NetFU6_Out1_1: FU6_Out1.1 XP12_Out1.2 | length 6.1
  Bottom Layer w1: XP12_Out1.2@80,8 FU6_Out1.1@80,14.093
NetFU6_Out2_1: FU6_Out2.1 XP12_Out2.2 | length 6.1
  Bottom Layer w1: XP12_Out2.2@60,8 FU6_Out2.1@60,14.093
NetFU6_Out3_1: FU6_Out3.1 XP12_Out3.2 | length 6.1
  Bottom Layer w1: XP12_Out3.2@40,8 FU6_Out3.1@40,14.093
NetFU6_Out4_1: FU6_Out4.1 XP12_Out4.2 | length 6.1
  Bottom Layer w1: XP12_Out4.2@20,8 FU6_Out4.1@20,14.093
NetFU7_Out1_1: FU7_Out1.1 XP12_Out1.3 | length 3.3
  Bottom Layer w1: XP12_Out1.3@82.5,23 FU7_Out1.1@82.5,26.268
NetFU7_Out2_1: FU7_Out2.1 XP12_Out2.3 | length 3.3
  Bottom Layer w1: XP12_Out2.3@62.5,23 FU7_Out2.1@62.5,26.268
NetFU7_Out3_1: FU7_Out3.1 XP12_Out3.3 | length 3.3
  Bottom Layer w1: XP12_Out3.3@42.5,23 FU7_Out3.1@42.5,26.268
NetFU7_Out4_1: FU7_Out4.1 XP12_Out4.3 | length 3.3
  Bottom Layer w1: XP12_Out4.3@22.5,23 FU7_Out4.1@22.5,26.268
NetFU8_Out1_1: FU8_Out1.1 XP12_Out1.4 | length 6.3
  Bottom Layer w1: XP12_Out1.4@85,8 FU8_Out1.1@85,14.268
NetFU8_Out2_1: FU8_Out2.1 XP12_Out2.4 | length 6.3
  Bottom Layer w1: XP12_Out2.4@65,8 FU8_Out2.1@65,14.268
NetFU8_Out3_1: FU8_Out3.1 XP12_Out3.4 | length 6.3
  Bottom Layer w1: XP12_Out3.4@45,8 FU8_Out3.1@45,14.268
NetFU8_Out4_1: FU8_Out4.1 XP12_Out4.4 | length 6.3
  Bottom Layer w1: XP12_Out4.4@25,8 FU8_Out4.1@25,14.268
NetFU9_Out1_1: FU9_Out1.1 XP11_Out1.1 | length 3.4
  Bottom Layer w1: XP11_Out1.1@87.5,23 FU9_Out1.1@87.5,26.443
NetFU9_Out2_1: FU9_Out2.1 XP11_Out2.1 | length 3.4
  Bottom Layer w1: XP11_Out2.1@67.5,23 FU9_Out2.1@67.5,26.443
NetFU9_Out3_1: FU9_Out3.1 XP11_Out3.1 | length 3.4
  Bottom Layer w1: XP11_Out3.1@47.5,23 FU9_Out3.1@47.5,26.443
NetFU9_Out4_1: FU9_Out4.1 XP11_Out4.1 | length 3.4
  Bottom Layer w1: XP11_Out4.1@27.5,23 FU9_Out4.1@27.5,26.443
NetFU10_Out1_1: FU10_Out1.1 XP11_Out1.2 | length 6.3
  Bottom Layer w1: XP11_Out1.2@90,8 FU10_Out1.1@90,14.268
NetFU10_Out2_1: FU10_Out2.1 XP11_Out2.2 | length 6.3
  Bottom Layer w1: XP11_Out2.2@70,8 FU10_Out2.1@70,14.268
NetFU10_Out3_1: FU10_Out3.1 XP11_Out3.2 | length 6.3
  Bottom Layer w1: XP11_Out3.2@50,8 FU10_Out3.1@50,14.268
NetFU10_Out4_1: FU10_Out4.1 XP11_Out4.2 | length 6.3
  Bottom Layer w1: XP11_Out4.2@30,8 FU10_Out4.1@30,14.268
NetFU11_Out1_1: FU11_Out1.1 XP11_Out1.3 | length 3.3
  Bottom Layer w1: XP11_Out1.3@92.5,23 FU11_Out1.1@92.5,26.268
NetFU11_Out2_1: FU11_Out2.1 XP11_Out2.3 | length 3.3
  Bottom Layer w1: XP11_Out2.3@72.5,23 FU11_Out2.1@72.5,26.268
NetFU11_Out3_1: FU11_Out3.1 XP11_Out3.3 | length 3.3
  Bottom Layer w1: XP11_Out3.3@52.5,23 FU11_Out3.1@52.5,26.268
NetFU11_Out4_1: FU11_Out4.1 XP11_Out4.3 | length 3.3
  Bottom Layer w1: XP11_Out4.3@32.5,23 FU11_Out4.1@32.5,26.268
NetFU12_Out1_1: FU12_Out1.1 XP11_Out1.4 | length 6.3
  Bottom Layer w1: XP11_Out1.4@95,8 FU12_Out1.1@95,14.268
NetFU12_Out2_1: FU12_Out2.1 XP11_Out2.4 | length 6.3
  Bottom Layer w1: XP11_Out2.4@75,8 FU12_Out2.1@75,14.268
NetFU12_Out3_1: FU12_Out3.1 XP11_Out3.4 | length 6.3
  Bottom Layer w1: XP11_Out3.4@55,8 FU12_Out3.1@55,14.268
NetFU12_Out4_1: FU12_Out4.1 XP11_Out4.4 | length 6.3
  Bottom Layer w1: XP11_Out4.4@35,8 FU12_Out4.1@35,14.268
NetHL1_2: HL1.2 R9.1 | length 7.7
  Top Layer w0.25: HL1.2@62.738,54.737 65.405,54.737 66.294,55.626 68.072,55.626 68.961,54.737 R9.1@69.723,54.737
NetHL2_2: HL2.2 R10.1 | length 7
  Top Layer w0.25: HL2.2@62.738,56.388 R10.1@69.723,56.388
NetHL3_2: HL3.2 R11.1 | length 7
  Top Layer w0.25: HL3.2@62.738,58.039 R11.1@69.723,58.039
NetHL4_2: HL4.2 R12.1 | length 7
  Top Layer w0.25: HL4.2@62.738,59.69 R12.1@69.723,59.69
RS485_DEFAULT: DD2.25 XP9.2 | length 14.7
  Top Layer w0.25: DD2.25@56.066,51.932 61.86,51.932 62.103,51.689 66.17,51.689 66.413,51.932 68.21,51.932 XP9.2@69.85,50.292
RST: C11.2 DD2.7 R6.2 XP10.3 | length 36
  Top Layer w0.25: C11.2@40.894,55.245 40.894,56.007 41.021,56.134 43.434,56.134 45.136,54.432 DD2.7@47.066,54.432 47.93,54.432 48.26,54.102 48.26,50.292 v2(47.752,49.784)
  Bottom Layer w0.25: v2(47.752,49.784) 54.483,49.784 55.245,49.022 66.04,49.022 XP10.3@67.31,47.752 R6.2@67.31,45.72
RX: DD1.1 DD2.22 | length 52
  Top Layer w0.25: v2(51.562,47.244) 52.578,46.228 53.848,46.228 54.356,46.736 54.356,47.752 53.316,48.792 DD2.22@53.316,50.182
  Bottom Layer w0.3: DD1.1@12.7,40.767 12.7,44.958 13.782,46.04 34.634,46.04 35.511,45.163 38.813,45.163 40.632,46.982 51.3,46.982 v2(51.562,47.244)
RX/TX: DD1.2 DD1.3 DD2.20 | length 48.8
  Top Layer w0.25: DD2.20@52.316,50.182 52.316,47.506 v2(52.578,47.244)
  Bottom Layer w0.3: DD1.2@13.97,40.767 13.97,42.672 14.224,42.926 15.24,42.926 ; DD1.3@15.24,40.767 15.24,42.926 ; v2(52.578,47.244) 52.481,47.244 51.711,46.474 40.842,46.474 39.031,44.663 35.292,44.663 34.415,45.54 17.092,45.54 15.24,43.688 15.24,42.926
SCK: DD2.15 DD4_Out1.11 DD4_Out2.11 DD4_Out3.11 DD4_Out4.11 | length 84
  Top Layer w0.25: v2(49.53,45.212) 49.784,45.212 49.816,45.244 DD2.15@49.816,50.182 ; v2(51.054,45.212) 51.054,44.704 51.562,44.196 v2(55.118,44.196)
  Top Layer w0.3: DD4_Out4.11@29.327,39.469 29.327,41.265 29.972,41.91 35.052,41.91 35.814,42.672 48.565,42.672 49.327,41.91 ; DD4_Out3.11@49.327,39.469 49.327,41.91 ; DD4_Out2.11@69.327,39.469 69.327,41.91 ; DD4_Out1.11@89.327,39.469 89.327,40.975 87.63,42.672 75.692,42.672 74.93,41.91 69.327,41.91 ; 49.327,41.91 54.864,41.91 v2(55.626,42.672) 68.565,42.672 69.327,41.91
  Bottom Layer w0.25: v2(49.53,45.212) v2(51.054,45.212) ; v2(55.118,44.196) 55.118,43.18 v2(55.626,42.672)
SWCLK: DD2.37 XP10.5 | length 17.1
  Top Layer w0.25: DD2.37@54.316,59.182 54.316,51.602 54.991,50.927 59.055,50.927 XP10.5@62.23,47.752
SWDIO: DD2.34 XP10.4 | length 17.2
  Top Layer w0.25: DD2.34@56.066,56.432 55.162,56.432 54.864,56.134 54.864,51.816 55.245,51.435 61.087,51.435 XP10.4@64.77,47.752
TX: DD1.4 DD2.21 | length 45.2
  Top Layer w0.25: DD2.21@52.816,50.182 52.816,48.022 v2(53.594,47.244)
  Bottom Layer w0.3: DD1.4@16.51,40.767 16.51,42.934 18.616,45.04 34.208,45.04 35.085,44.163 39.238,44.163 41.05,45.974 51.918,45.974 52.124,46.18 52.784,46.18 53.594,46.99 v2(53.594,47.244)
VCC: R3.1 VD1.1 XP1.4 XP1.5 XP1.14 XP1.15 XP2.4 XP2.5 XP2.14 XP2.15 XP3.4 XP3.5 XP3.14 XP3.15 XP5.4 XP5.5 XP5.14 XP5.15 XP6.1 XP8.4 XP8.5 XP8.14 XP8.15 | length 225.7
  Top Layer w0.5: 1.3,58.42 R3.1@3.048,58.42
  Top Layer w1: XP6.1@3.556,23 3.81,23.254 VD1.1@3.81,26.924 ; 11.356,83.64 XP8.5@11.356,80.078 11.356,78.808 XP8.4@12.626,77.538 12.626,76.126 11.356,74.856 XP8.14@11.356,73.474 11.356,72.204 XP8.15@12.626,70.934 ; 30.374,83.714 XP5.5@30.374,80.078 30.374,78.808 XP5.4@31.644,77.538 31.644,76.348 30.374,75.078 XP5.14@30.374,73.474 30.374,72.204 XP5.15@31.644,70.934 ; 49.374,83.41 XP3.5@49.374,80.078 49.374,78.808 XP3.4@50.644,77.538 50.644,76.552 49.374,75.282 XP3.14@49.374,73.474 49.374,72.204 XP3.15@50.644,70.934 ; 68.374,83.614 XP2.5@68.374,80.078 68.374,78.808 XP2.4@69.644,77.538 69.644,75.994 68.374,74.724 XP2.14@68.374,73.474 68.374,72.204 XP2.15@69.644,70.934 ; 84.074,83.82 86.614,83.82 87.374,83.06 XP1.5@87.374,80.078 87.374,78.808 XP1.4@88.644,77.538 88.644,76.198 87.374,74.928 XP1.14@87.374,73.474 87.374,72.204 XP1.15@88.644,70.934
  Top Layer w1.5: XP6.1@5,23 3.556,23 2.684,23 1.3,24.384 1.3,58.42 1.3,82.326 2.794,83.82 84.074,83.82
VCC_ADC: C3.2 DD2.11 R3.2 R4.1 | length 48.5
  Top Layer w0.25: C3.2@6.604,56.642 6.604,55.753 6.922,55.435 12.509,55.435 13.981,56.907 36.95,56.907 38.593,55.264 38.593,53.929 40.669,51.853 45.757,51.853 46.336,52.432 DD2.11@47.066,52.432
  Top Layer w0.5: R3.2@5.08,58.42 R4.1@6.604,58.42 C3.2@6.604,56.642
pads on no net: DA1.2 DA1.3 DA1.5 DA1.9@5.715,45.898 DD2.1 DD2.33 DD2.45 DD2.46 XP1.0 XP2.0 XP3.0 XP5.0 XP8.0

## Polygon pours and split planes (outlines as drawn)
GND on Inner Top Layer "gnd inner" (solid, pour order 6): 100,27.305 100,68.961 3.302,68.961 3.302,27.305 100,27.305
+3V3 on Inner Bottom Layer "vcc inner" (solid, pour order 8): 3.302,68.961 100,68.961 100,27.305 3.302,27.305 3.302,68.961
GND on Bottom Layer "gnd step down" (solid, pour order 10): 0.635,48.895 1.905,50.165 2.794,50.165 8.89,50.165 10.16,48.895 10.16,45.085 8.89,43.815 7.62,42.545 7.62,41.91 6.985,41.275 1.905,41.275 0.635,42.545
GND on Top Layer "gnd mcu" (solid, pour order 12): 47.066,51.932 48.816,50.182 54.316,50.182 56.066,51.932 56.066,57.432 54.316,59.182 48.816,59.182 47.066,57.432

## Keep-outs
Keep-Out Layer:
  the board outline again, w0.2

## Silkscreen, mask and mechanical layers (free items; w line width, h text height)
Top Overlay:
  lines w0.2: 2,2 98,2 98,98 2,98 2,2
  text "Lema" at 20.566,61.293 h1
  text "Smart home main module" at 20.566,59.896 h1
  text "(2020.09.05)" at 20.566,58.626 h1